# Altium PCB Panel.PcbDoc
Units mil, origin at the board's own origin, x right, y up, seen from the top; angles counter-clockwise.
Board outline 6000 x 2050 mil, 2 copper layers (Top Layer, Bottom Layer); 22 components, 74 nets, 86 pads, 0 vias.
Unrouted connection lines stored in the file: 44.
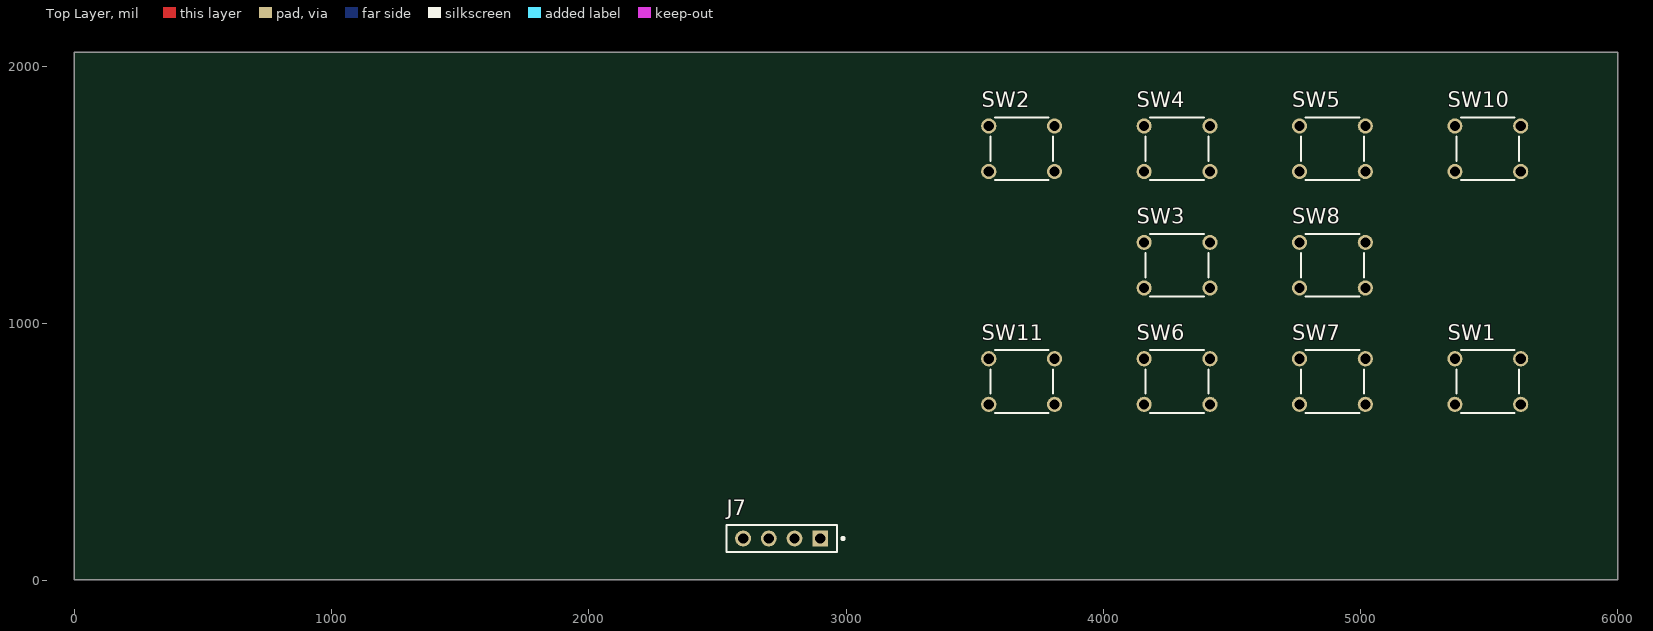
[diagram p0: Top Layer view]
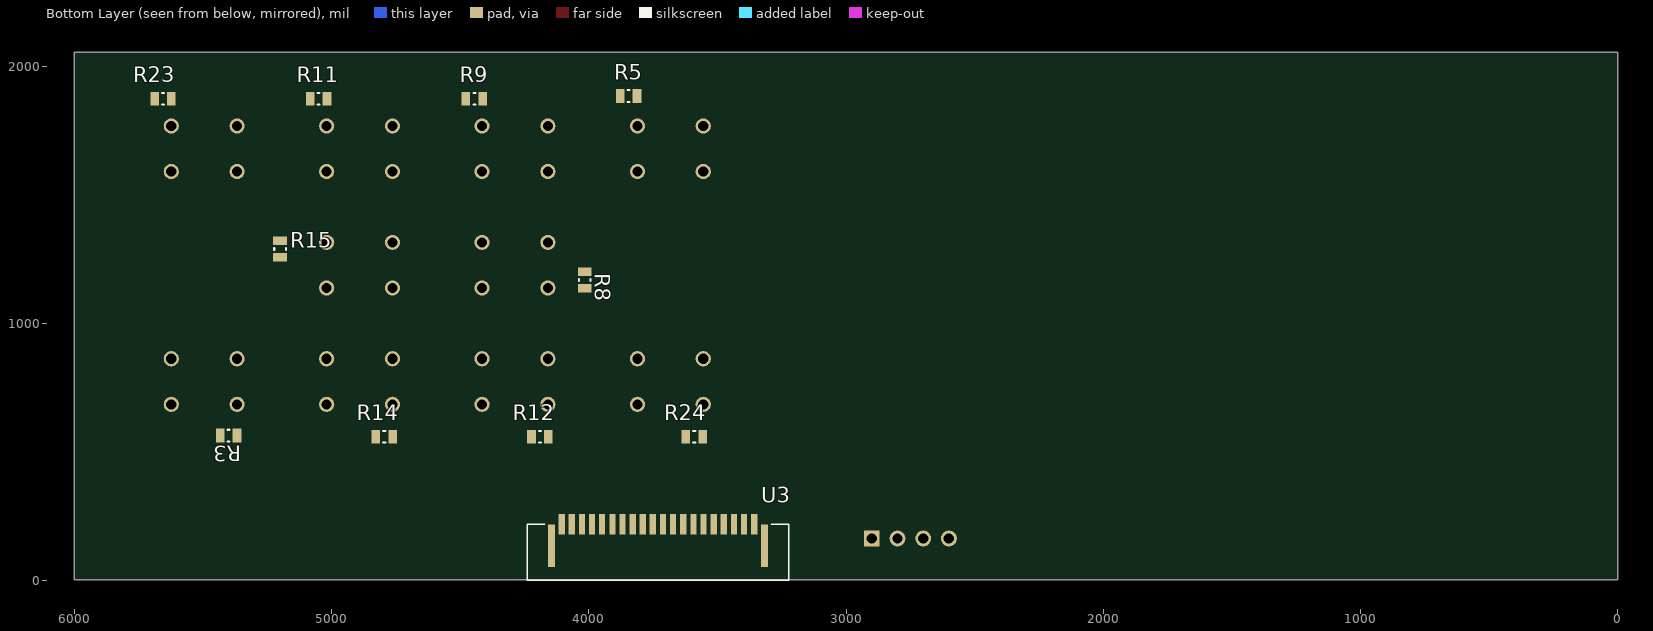
[diagram p1: Bottom Layer view, seen from below]

## Layer stack, top to bottom
Top Solder: solder mask 0.4, Solder Resist, Dk 3.5
Top Layer: signal copper 1.4
Dielectric 1: dielectric 12.6, FR-4, Dk 4.8
Bottom Layer: signal copper 1.4
Bottom Solder: solder mask 0.4, Solder Resist, Dk 3.5

## Board outline
0,5 6000,5 6000,2055 0,2055

## Design rules (kind name [scope] priority, off if disabled: settings)
Clearance [All] p1: gap=10 ignorepadtopadclearanceinfootprint=FALSE except(0: Arc-Hole Track-Hole SMDPad-Hole THPad-Hole Via-Hole Fill-Hole Poly-Hole Region-Hole Text-Hole)
PolygonConnect [All] p1: connectstyle=Relief reliefconductorwidth=10 reliefentries=4 polygonreliefangle="90 Angle" airgapwidth=10
RoutingVias [All] p1: holewidth=28 width=50 viastyle="Through Hole" minholewidth=28 minwidth=50 maxholewidth=28 maxwidth=50
SolderMaskExpansion [All] p1: expansion=4 istentingtop=FALSE
Width [All] p1: maxlimit=10 minlimit=10 preferedwidth=10
30 further rules are at their usual default settings.

## Components (designator, comment, footprint, x,y, rotation, side; value= is the part's Value field where it differs from the comment)
J7 "4x1_Female_Header" FP-2212S-04SG-85-MFG 2750,165 r180 top
R3 "1K" RESC2013X50X30LL20T20 5400,565 r0 bottom
R5 "1K" RESC2013X50X30LL20T20 3845,1885 r0 bottom
R8 "1K" RESC2013X50X30LL20T20 4015,1170 r270 bottom
R9 "1K" RESC2013X50X30LL20T20 4445,1875 r0 bottom
R11 "1K" RESC2013X50X30LL20T20 5050,1875 r0 bottom
R12 "1K" RESC2013X50X30LL20T20 4190,560 r0 bottom
R14 "1K" RESC2013X50X30LL20T20 4795,560 r0 bottom
R15 "1K" RESC2013X50X30LL20T20 5200,1290 r90 bottom
R23 "1K" RESC2013X50X30LL20T20 5655,1875 r0 bottom
R24 "1K" RESC2013X50X30LL20T20 3590,560 r0 bottom
SW1 "SPDT_THT" 4301x60707x6 5495,775 r180 top
SW2 "SPDT_THT" 4301x60707x6 3682.95,1680 r0 top
SW3 "SPDT_THT" 4301x60707x6 4286.97,1227.5 r180 top
SW4 "SPDT_THT" 4301x60707x6 4286.97,1680 r0 top
SW5 "SPDT_THT" 4301x60707x6 4890.98,1680 r0 top
SW6 "SPDT_THT" 4301x60707x6 4286.97,775 r180 top
SW7 "SPDT_THT" 4301x60707x6 4890.98,775 r180 top
SW8 "SPDT_THT" 4301x60707x6 4890.98,1227.5 r0 top
SW10 "SPDT_THT" 4301x60707x6 5495,1680 r0 top
SW11 "SPDT_THT" 4301x60707x6 3682.95,775 r180 top
U3 "SFW20R-2STE1LF" FCI_SFW20R-2STE1LF 3731,328 r0 bottom

## Footprints (in the part's own frame and the unit in brackets; to place one, negate y for a bottom-side part, rotate by r counter-clockwise, add the part's x,y. Pads: shape width x height; smd on the part's side, far side on the other; paste and mask are expansions set on the pad)
4301x60707x6 [mm] "6x6mm Tact Switch, THT version"
  round 1.5 hole 1: A1(-3.25,2.25) A2(3.25,2.25) B1(-3.25,-2.25) B2(3.25,-2.25)
  silkscreen extent -3.1,-3.1 3.1,3.1, body extent -3.95,-3.1 3.95,3.1, height 7.05
FCI_SFW20R-2STE1LF [mil]
  rect 24x79 smd: 1(374,108) 2(335,108) 3(295,108) 4(256,108) 5(217,108) 6(177,108) 7(138,108) 8(98,108) 9(59,108) 10(20,108) 11(-20,108) 12(-59,108) 13(-98,108) 14(-138,108) 15(-177,108) 16(-217,108) 17(-256,108) 18(-295,108) 19(-335,108) 20(-374,108)
  rect 28x165 smd: 21(-414,192) 22(414,192)
  silkscreen extent -508,108 508,326
FP-2212S-04SG-85-MFG [mm]
  rect 1.57x1.57 hole 1.02 paste-2539.97 mask+0: 1(-3.81,0)
  round 1.57 hole 1.02 paste-2539.97 mask+0: 2(-1.27,0) 3(1.27,0) 4(3.81,0)
  silkscreen extent -6.18,-1.35 5.46,1.35, body extent -5.56,-1.45 5.56,1.45, height 0.25
RESC2013X50X30LL20T20 [mm] "Chip Resistor, 2-Leads, Body 2.00x1.25mm, IPC High Density"
  rect 0.85x1.35 smd: 1(-0.825,0) 2(0.825,0)
  silkscreen extent -0.1,-0.58 0.1,0.58, body extent -1.1,-0.72 1.1,0.72, height 0.5

## Part data
J7: library part CMP-12414-000003-1, "Header, Rectangular, 4 Positions, 2.54mm Pitch, Receptacle, Vertical, Through-Hole", Flammability Rating="UL94 V-0", Insulation Resistance=1GR, Contact Material=Bronze, Contact Plating=Gold, Gender=Receptacle, Height=0.35inch, Length=0.43inch, Mount="Through Hole", Number of contacts=4, Number of Rows=1, REACH SVHC="No SVHC", RoHS Compliant=Yes, Termination="Through Hole", Weight=0.11lb, Width=0.12inch
R3 R5 R8 R9 R11 R12 R14 R15 R23 R24: library part CMP-2001-04896-1, Manufacturer="Vishay Dale", Part Number=CRCW08050000Z0EA
SW1 SW2 SW3 SW4 SW5 SW6 SW7 SW8 SW10 SW11: library part CMP-1453-00013-2, Color=Black, Contact Current Rating=50mA, Insulation Resistance=100MΩ, Max Operating Temperature=85°C, Min Operating Temperature=-40°C, Voltage Rating=12V, Actuator Material="Liquid Crystal Polymer, Polymer", Contact Material=Steel, Contact Plating=Silver, Current Rating=50mA, Diameter=3mm, Height=7mm, Illumination Type="Illuminated, Non-Illuminated", Length=6.2mm, Mechanical Life=1Mcycles, Mount="Through Hole", NexarPartId=38794740, Packaging=Bulk, REACH SVHC="No SVHC", RoHS=Compliant, Switch Function=Off-Mom, Switch Travel=250µm, Termination="PC Pin", Throw Configuration=SPST, Width=6.2mm
U3: library part CMP-008-000000-1, "FFC/FPC CONNECTOR, RECEPTACLE 20POS 1ROW", Package=None, Availability=Unavailable, Component Type=Standard, Design Item ID=SFW20R-2STE1LF, MP=SFW20R-2STE1LF, Pin Count=20, Price=None, Source=SFW20R-2STE1LF.SchLib

## Nets (pads, with @x,y where several pads share a name; then routed paths per layer and width w, separated by ;. In a path a pad name is that pad's centre, name@x,y a point inside that pad or via, vN(x,y) a via of type N, cw(c..) or ccw(c..) an arc to the next point about the centre after c; other vN are vias at no path point)
3.31: J7.3 SW1.B1 SW2.B1 SW3.B1 SW4.B1 SW5.B1 SW6.B1 SW7.B1 SW8.B1 SW10.B1 SW11.B1 U3.20
3v3: 
+12: 
Ball_Fedder: 
Ball_Fedder1: SW5.A1 U3.16
BOOT: 
Buzzer: 
EN: 
Fwd: 
Fwd1: SW3.A1 U3.4
GND: 
GND1: J7.4 R3.1 R5.1 R8.1 R9.1 R11.1 R12.1 R14.1 R15.1 R23.1 R24.1 U3.7
Hall_sw1: 
Hall_sw2: 
In1: 
In2: 
L_Swing: 
L_Swing1: SW4.A1 U3.5
Mode: 
Mode1: SW8.A1 U3.6
Motor1: 
Motor2: 
Motor_3: 
NetD1_2: 
NetD2_C: 
NetD3_C: 
NetD4_1: 
NetD5_2: 
NetD6_C: 
NetD7_C: 
NetDS1_1: 
NetDS2_1: 
NetLS1_N: 
NetQ5_2: 
NetR1_1: 
NetR3_2: R3.2 SW1.A2
NetR4_2: 
NetR5_2: R5.2 SW2.A2
NetR6_1: 
NetR8_2: R8.2 SW3.A2
NetR9_2: R9.2 SW4.A2
NetR11_2: R11.2 SW5.A2
NetR12_2: R12.2 SW6.A2
NetR14_2: R14.2 SW7.A2
NetR15_2: R15.2 SW8.A2
NetR16_1: 
NetR18_2: 
NetR20_1: 
NetR21_1: 
NetR23_2: R23.2 SW10.A2
NetR24_2: R24.2 SW11.A2
NetR26_1: 
R_Swing: 
R_Swing1: SW6.A1 U3.3
RST: 
RST1: SW7.A1 U3.8
Rx: 
SCL: 
SCL1: J7.1 U3.19
SDA: 
SDA1: J7.2 U3.18
Speed1: 
Speed2: 
Speed_Dec: 
Speed_Dec1: SW1.A1 U3.2
Speed_Inc: 
Speed_Inc1: SW2.A1 U3.1
Swing_Dec: 
Swing_Dec1: SW11.A1 U3.15
Swing_Inc: 
Swing_Inc1: SW10.A1 U3.17
Tx: 
VCC: 
Vin: 
pads on no net: SW1.B2 SW2.B2 SW3.B2 SW4.B2 SW5.B2 SW6.B2 SW7.B2 SW8.B2 SW10.B2 SW11.B2 U3.9 U3.10 U3.11 U3.12 U3.13 U3.14 U3.21 U3.22

## Silkscreen, mask and mechanical layers (free items; w line width, h text height)
Mechanical 1:
  circle w0.5: c3137.41,1900.17 r55.12
  circle w0.5: c3137.41,663.95 r55.12
  circle w0.5: c168.9,663.95 r55.12
  circle w0.5: c168.9,1900.17 r55.12
  circle w0.25: c1653.15,1289.94 r0.12
  circle w0.25: c1653.15,1289.94 r0.12
  circle w0.25: c1653.15,1289.94 r0.12
  lines w0.5: 261.42,821.43 261.42,1758.44 3044.89,1758.44 3044.89,821.43 261.42,821.43